# EAGLE board A1200_USB_Teensy (EAGLE 9.0.0)
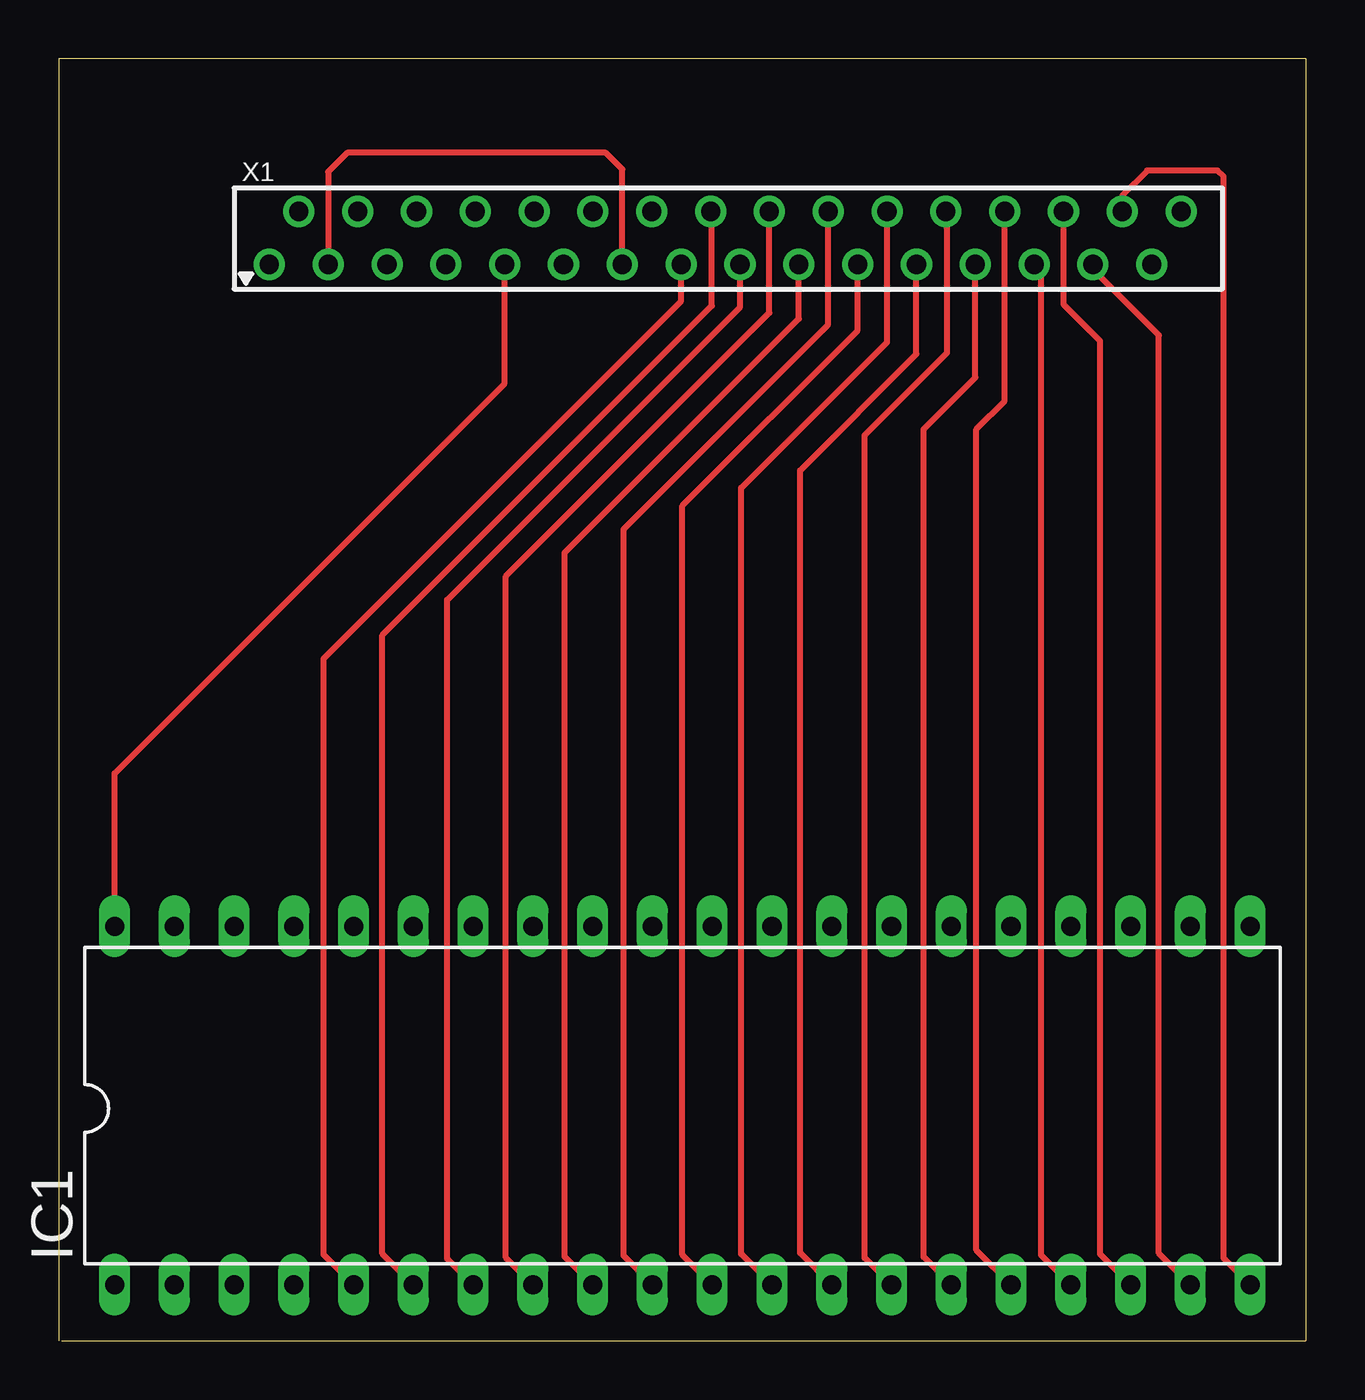
[diagram p0: board, top side]
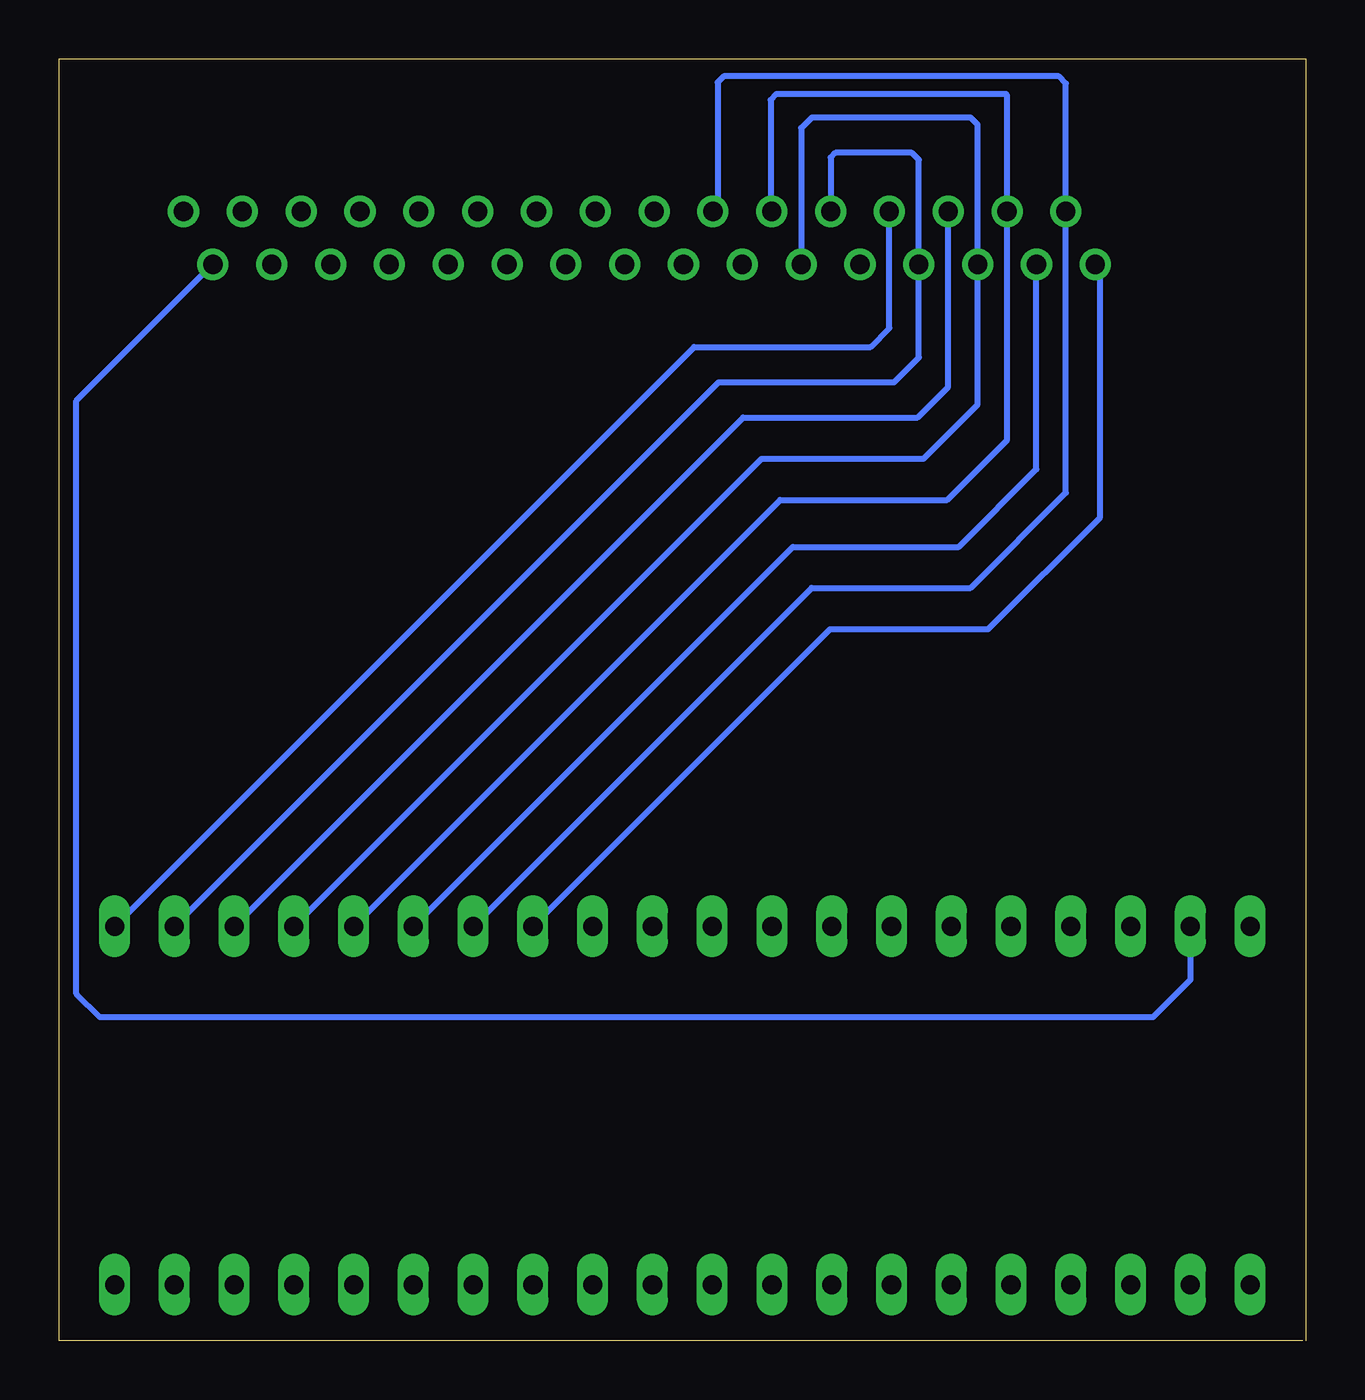
[diagram p1: board, bottom side, seen from below]

Size 53 x 54.5 mm. Coordinates in mm from the lower left corner, seen from the top.
Outline: 0.12,0 53,0 53,54.5 0,54.5 0,0
Copper layers (1*16): Top 0.035mm / dielectric 1.5mm / Bottom 0.035mm
Design rules "SeeedStudio_2layer_DRU_no_angle_20140221 *": minimum track width 8mil, minimum drill 12mil, track to track 7mil, track to pad 7mil, pad to pad 7mil, via to via 7mil, smd to smd 0mil, copper to edge 10mil, drill to drill 10mil, minimum pad ring 10mil, minimum via ring 6mil, stop-mask expansion 2mil, vias tented up to drill 100mil, thermal gap 10mil

## Footprints (pad centres in the part's own frame; a part is rotated, then mirrored left to right if it is on the bottom)
DIL40 = drill 0.813 long: 1 -24.13,-7.62; 2 -21.59,-7.62; 3 -19.05,-7.62; 4 -16.51,-7.62; 5 -13.97,-7.62; 6 -11.43,-7.62; 7 -8.89,-7.62; 8 -6.35,-7.62; 9 -3.81,-7.62; 10 -1.27,-7.62; 11 1.27,-7.62; 12 3.81,-7.62; 13 6.35,-7.62; 14 8.89,-7.62; 15 11.43,-7.62; 16 13.97,-7.62; 17 16.51,-7.62; 18 19.05,-7.62; 19 21.59,-7.62; 20 24.13,-7.62; 21 24.13,7.62; 22 21.59,7.62; 23 19.05,7.62; 24 16.51,7.62; 25 13.97,7.62; 26 11.43,7.62; 27 8.89,7.62; 28 6.35,7.62; 29 3.81,7.62; 30 1.27,7.62; 31 -1.27,7.62; 32 -3.81,7.62; 33 -6.35,7.62; 34 -8.89,7.62; 35 -11.43,7.62; 36 -13.97,7.62; 37 -16.51,7.62; 38 -19.05,7.62; 39 -21.59,7.62; 40 -24.13,7.62
FH21-30S-1DSA = drill 0.813: 1 -14.5,-1; 2 -13.25,1.25; 3 -12,-1; 4 -10.75,1.25; 5 -9.5,-1; 6 -8.25,1.25; 7 -7,-1; 8 -5.75,1.25; 9 -4.5,-1; 10 -3.25,1.25; 11 -2,-1; 12 -0.75,1.25; 13 0.5,-1; 14 1.75,1.25; 15 3,-1; 16 4.25,1.25; 17 5.5,-1; 18 6.75,1.25; 19 8,-1; 20 9.25,1.25; 21 10.5,-1; 22 11.75,1.25; 23 13,-1; 24 14.25,1.25; 25 15.5,-1; 26 16.75,1.25; 27 18,-1; 28 19.25,1.25; 29 20.5,-1; 30 21.75,1.25; 31 23,-1; 32 24.25,1.25

## Placement (x,y rotation side)
IC1  Teensy 2++  [DIL40]  26.5,10 0 top
X1  FH21-30S-1DSA  [FH21-30S-1DSA]  23.45,46.76 0 top

## Library data of the parts
IC1 = ic-package
X1 = con-hirose; OC_FARNELL: unknown; OC_NEWARK: unknown

## Nets
B6: IC1.39 X1.31
C0: IC1.13 X1.23
C1: IC1.14 X1.24
C2: IC1.15 X1.25
C3: IC1.16 X1.26
C4: IC1.17 X1.27
C5: IC1.18 X1.28
C6: IC1.19 X1.29
C7: IC1.20 X1.30
D2: IC1.5 X1.15
D3: IC1.6 X1.16
D4: IC1.7 X1.17
D5: IC1.8 X1.18
D6: IC1.9 X1.19
D7: IC1.10 X1.20
E0: IC1.11 X1.21
E1: IC1.12 X1.22
F0: IC1.28 X1.1
F1: IC1.27 X1.2 X1.14
F2: IC1.26 X1.3 X1.13
F3: IC1.25 X1.4 X1.12
F4: IC1.24 X1.5 X1.11
F5: IC1.23 X1.6
F6: IC1.22 X1.7 X1.10
F7: IC1.21 X1.8
VCC: IC1.40 X1.9

## Tracks (layer width: path | path; a pad name or v marks a point on that pad's centre or on a via)
B6
  Bottom 0.254: IC1.39 4.91,15.34 6.5,13.75 51.25,13.75 52.25,14.75 52.25,39.96 X1.31
C0
  Top 0.254: IC1.13 31.5,3.73 31.5,37 36.45,41.95 X1.23
C1
  Top 0.254: IC1.14 34.25,3.52 34.25,38.5 37.75,42 37.75,47.96 X1.24
C2
  Top 0.254: IC1.15 36.75,3.56 36.75,38.75 38.95,40.95 X1.25
C3
  Top 0.254: IC1.16 39,3.85 39,38.75 40.2,39.95 X1.26
C4
  Top 0.254: IC1.17 41.75,3.64 41.75,45.46 X1.27
C5
  Top 0.254: IC1.18 44.25,3.68 44.25,42.5 42.7,44.05 X1.28
C6
  Top 0.254: IC1.19 46.75,3.72 46.75,42.75 43.95,45.55 X1.29
C7
  Top 0.254: IC1.20 49.5,3.51 49.5,49.5 49.25,49.75 46.25,49.75 45.2,48.7 X1.30
D2
  Top 0.254: IC1.5 11.25,3.66 11.25,29 26.45,44.2 X1.15
D3
  Top 0.254: IC1.6 13.75,3.7 13.75,30 27.75,44 27.75,47.96 X1.16
D4
  Top 0.254: IC1.7 16.5,3.49 16.5,31.5 28.95,43.95 X1.17
D5
  Top 0.254: IC1.8 19,3.53 19,32.5 30.2,43.7 X1.18
D6
  Top 0.254: IC1.9 21.5,3.57 21.5,33.5 31.45,43.45 X1.19
D7
  Top 0.254: IC1.10 24,3.61 24,34.5 32.7,43.2 X1.20
E0
  Top 0.254: IC1.11 26.5,3.65 26.5,35.5 33.95,42.95 X1.21
E1
  Top 0.254: IC1.12 29,3.69 29,36.25 35.2,42.45 X1.22
F0
  Bottom 0.254: IC1.28 20.22,30.25 13.5,30.25 8.75,35 8.75,45.56 X1.1
F1
  Bottom 0.254: IC1.27 21.01,32 14.25,32 10.2,36.05 X1.2 10.2,53.45 10.5,53.75 24.75,53.75 25,53.5 25,48.21 X1.14
F2
  Top 0.254: X1.13 23.95,49.8 23.25,50.5 12.25,50.5 11.45,49.7 X1.3
  Bottom 0.254: IC1.26 21.8,33.75 14.75,33.75 11.45,37.05 X1.3
F3
  Bottom 0.254: IC1.25 22.34,35.75 15.25,35.75 12.7,38.3 X1.4 12.7,52.95 12.75,53 22.5,53 22.75,52.75 22.75,48.06 X1.12
F4
  Bottom 0.254: IC1.24 23.13,37.5 16.25,37.5 13.95,39.8 X1.5 13.95,51.7 14.25,52 21,52 21.45,51.55 X1.11
F5
  Bottom 0.254: IC1.23 23.92,39.25 16.5,39.25 15.2,40.55 X1.6
F6
  Bottom 0.254: IC1.22 24.96,40.75 17.5,40.75 16.45,41.8 X1.7 16.45,50.2 16.75,50.5 20,50.5 20.2,50.3 X1.10
F7
  Bottom 0.254: IC1.21 26,42.25 18.5,42.25 17.7,43.05 X1.8
VCC
  Top 0.254: IC1.40 2.37,24.12 18.95,40.7 X1.9

## Text on the board
tValues: A1200 Membrane